# EAGLE board pic10_dev (EAGLE 7.5.0)
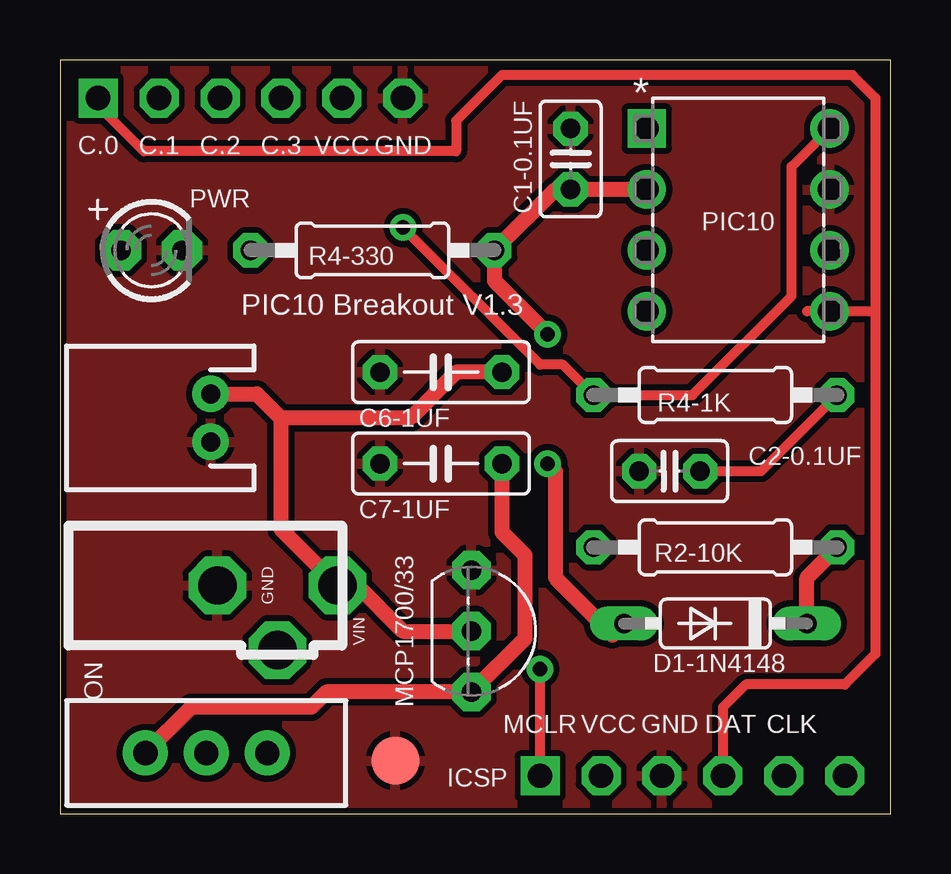
[diagram p0: board, top side]
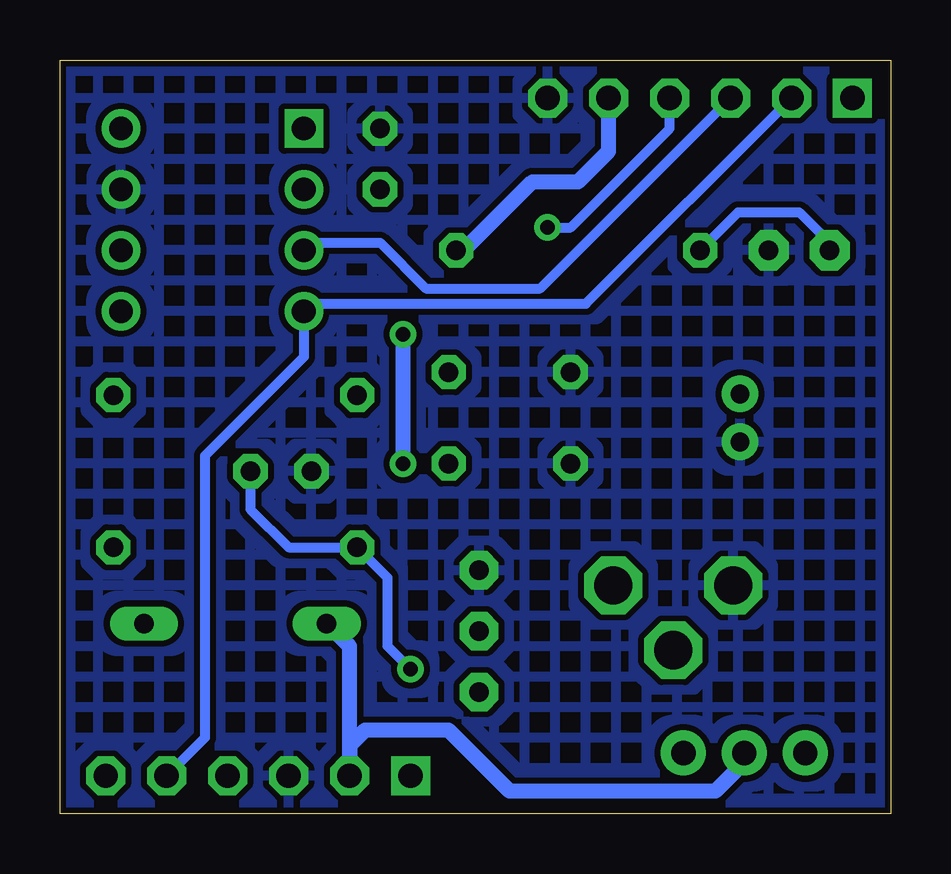
[diagram p1: board, bottom side, seen from below]

Size 34.61 x 31.43 mm. Coordinates in mm from the lower left corner, seen from the top.
Outline: 0,0 34.61,0 34.61,31.43 0,31.43 0,0
Copper layers (1*16): Top 0.035mm / dielectric 1.5mm / Bottom 0.035mm
Design rules "SparkFun *": minimum track width 20mil, minimum drill 20mil, track to track 8mil, track to pad 8mil, pad to pad 8mil, via to via 8mil, smd to smd 8mil, copper to edge 10mil, drill to drill 8mil, minimum pad ring 12mil, minimum via ring 10mil, stop-mask expansion 4mil, vias tented up to drill 25mil, thermal gap 10mil
Net classes: 0 default: width 0.508 mm; 1 GND: width 0.889 mm, drill 0.508 mm, clearance 0.254 mm; 2 VCC: width 0.889 mm, drill 0.508 mm, clearance 0.254 mm

## Footprints (pad centres in the part's own frame; a part is rotated, then mirrored left to right if it is on the bottom)
C025-025X050 = drill 0.813 octagon: 1 -1.27,0; 2 1.27,0
C050-025X075 = drill 0.813 octagon: 1 -2.54,0; 2 2.54,0
DO35-7 = drill 0.813 long: A 3.81,0; C -3.81,0
1X06 = drill 1.016 square: 1 -6.35,0 | drill 1.016 octagon: 2 -3.81,0; 3 -1.27,0; 4 1.27,0; 5 3.81,0; 6 6.35,0
3.5X1.3MM_DC_JACK = drill 1.6 octagon: 1 0,0; 2 -5,0; 3 -2.5,-2.7
JST-2-PTH = drill 0.787 pad 1.524: 1 -1,0; 2 1,0
LED3MM = drill 0.813 pad 1.676 octagon: A -1.27,0; K 1.27,0
TO92- = drill 0.813 pad 1.6 octagon: 1 2.54,0; 2 0,0; 3 -2.54,0
SWITCH-SPDT = drill 1.016 pad 1.88: 1 0,2.54; 2 0,0; 3 0,-2.54
0207/10 = drill 0.813 octagon: 1 -5.08,0; 2 5.08,0
TP20R = smd 2 x 2: TP 0,0
DIP254P762X533-8 = drill 0.991 square: 1 -7.62,7.62 | drill 0.991: 2 -7.62,5.08; 3 -7.62,2.54; 4 -7.62,0; 5 0,0; 6 0,2.54; 7 0,5.08; 8 0,7.62

## Placement (x,y rotation side)
C1-0.1UF  [C025-025X050]  21.27,27.3 90 top
C2-0.1UF  [C025-025X050]  25.4,14.29 180 top
C6-1UF  1uF  [C050-025X075]  15.87,18.41 180 top
C7-1UF  1uF  [C050-025X075]  15.87,14.61 180 top
D1-1N4148  1N4148  [DO35-7]  27.3,7.94 180 top
ICSP  [1X06]  26.35,1.59 0 top
J7  3.5 X 1.3 mm  [3.5X1.3MM_DC_JACK]  11.56,9.53 0 top
JP1  [1X06]  7.94,29.84 0 top
JP7  LiPo Battery  [JST-2-PTH]  6.27,16.51 90 top
LED2  Red  [LED3MM]  3.81,23.5 0 top
MCP  MCP  [TO92-]  17.14,7.62 270 top
ON  EXT  [SWITCH-SPDT]  6.1,2.54 270 top
R2-10K  [0207/10]  27.3,11.11 0 top
R4-1K  [0207/10]  27.3,17.46 0 top
R4-330  470R  [0207/10]  13.02,23.5 0 top
TP1  TPSTP20R  [TP20R]  13.97,2.22 0 top
U$1  PIC10F200-I/P  [DIP254P762X533-8]  32.07,20.95 0 top

## Library data of the parts
C1-0.1UF C2-0.1UF C6-1UF C7-1UF R2-10K R4-1K R4-330 = resistor
D1-1N4148 = diode
ICSP JP1 = pinhead
J7 = MY_CONN
JP7 ON = SparkFun
LED2 = adafruit
MCP = MY_IC
TP1 = testpad
U$1 = thierry_eagle; MPN: PIC10F200-I/P; OC_FARNELL: 1212714; OC_NEWARK: 96K3749; PACKAGE: DIP-8; SUPPLIER: Microchip

## Nets
FLOAT: ON.1
GND [GND]: C1-0.1UF.2 C2-0.1UF.2 C6-1UF.2 C7-1UF.2 ICSP.3 J7.2 JP1.6 JP7.1 LED2.K MCP.3 TP1.TP U$1.7
GP0: ICSP.4 JP1.1 U$1.5
GP1: ICSP.5 JP1.2 U$1.4
GP2: JP1.3 U$1.3
GP3: JP1.4 R4-1K.1 U$1.8
N$1: LED2.A R4-330.1
N$5: D1-1N4148.C R2-10K.2
VCC [VCC]: C1-0.1UF.1 D1-1N4148.A ICSP.2 JP1.5 ON.2 R4-330.2 U$1.2
VCCEXT [VCC]: C6-1UF.1 J7.1 JP7.2 MCP.2
VCCREG [VCC]: C7-1UF.1 MCP.1 ON.3
VPP: C2-0.1UF.1 ICSP.1 R2-10K.1 R4-1K.2

## Tracks (layer width: path | path; a pad name or v marks a point on that pad's centre or on a via)
GND
  pour Top: -0.64,32.07 34.92,32.07 34.92,-0.64 -0.64,-0.64
  pour Bottom (hatched): -0.64,32.07 34.92,32.07 34.92,-0.64 -0.64,-0.64
GP0
  Top 0.406: U$1.5 32.07,20.64 | 33.97,20.95 33.97,29.84 33.02,30.8 18.42,30.8 16.51,28.89 16.51,27.62 3.49,27.62 1.59,29.53 JP1.1 | 33.97,20.95 33.97,6.67 32.7,5.4 28.57,5.4 27.62,4.45 ICSP.4 | U$1.5 31.11,20.95 | U$1.5 33.97,20.95
GP1
  Bottom 0.406: ICSP.5 28.57,3.17 28.57,14.92 24.45,19.05 U$1.4 24.13,21.27 12.7,21.27 JP1.2
GP2
  Bottom 0.406: U$1.3 24.45,23.81 21.27,23.81 19.37,21.91 14.6,21.91 JP1.3
GP3  (via drill 0.6)
  Top 0.406: U$1.8 30.48,26.99 30.48,21.59 26.35,17.46 R4-1K.1 20.96,18.73 20,18.73 v14.29,24.45
  Bottom 0.406: v14.29,24.45 13.33,24.45 9.21,28.58 JP1.4
N$1
  Bottom 0.406: R4-330.1 6.35,25.08 3.81,25.08 2.54,23.81 LED2.A
N$5
  Top 0.635: D1-1N4148.C 31.11,9.84 R2-10K.2
VCC  (via drill 0.6)
  Top 0.635: U$1.2 C1-0.1UF.1 20.64,26.04 R4-330.2 18.1,22.23 v20.32,20 | v20.32,14.61 20.64,14.29 20.64,9.84 23.02,7.46 D1-1N4148.A
  Bottom 0.635: ON.2 6.1,2.16 7.3,0.95 15.87,0.95 18.42,3.49 21.91,3.49 22.54,2.86 ICSP.2 22.54,6.98 D1-1N4148.A | v20.32,20 v20.32,14.61 | R4-330.2 17.78,23.5 14.92,26.35 13.02,26.35 11.75,27.62 JP1.5
VCCEXT
  Top 0.635: JP7.2 8.21,17.51 9.21,16.51 | 9.21,16.51 9.21,11.88 J7.1 12.38,9.53 14.29,7.62 MCP.2 | C6-1UF.1 16.51,18.41 14.6,16.51 9.21,16.51
VCCREG
  Top 0.635: C7-1UF.1 18.42,11.75 19.37,10.79 19.37,7.3 MCP.1 11.11,5.08 10.48,4.45 5.46,4.45 ON.3
VPP  (via drill 0.6)
  Top 0.406: ICSP.1 v20,6.03 | C2-0.1UF.1 29.21,14.29 R4-1K.2
  Bottom 0.406: v20,6.03 20.96,6.98 20.96,9.84 R2-10K.1 25.08,11.11 26.67,12.7 C2-0.1UF.1

## Text on the board
tNames: C.0 | C.1 | C.2 | C.3 | VCC | GND | PWR | PIC10 | PIC10 Breakout V1.3 | GND | VIN | MCP1700/33 | MCLR | VCC | GND | DAT | CLK